# EAGLE board decrementeur3b_2layers (EAGLE 6.3)
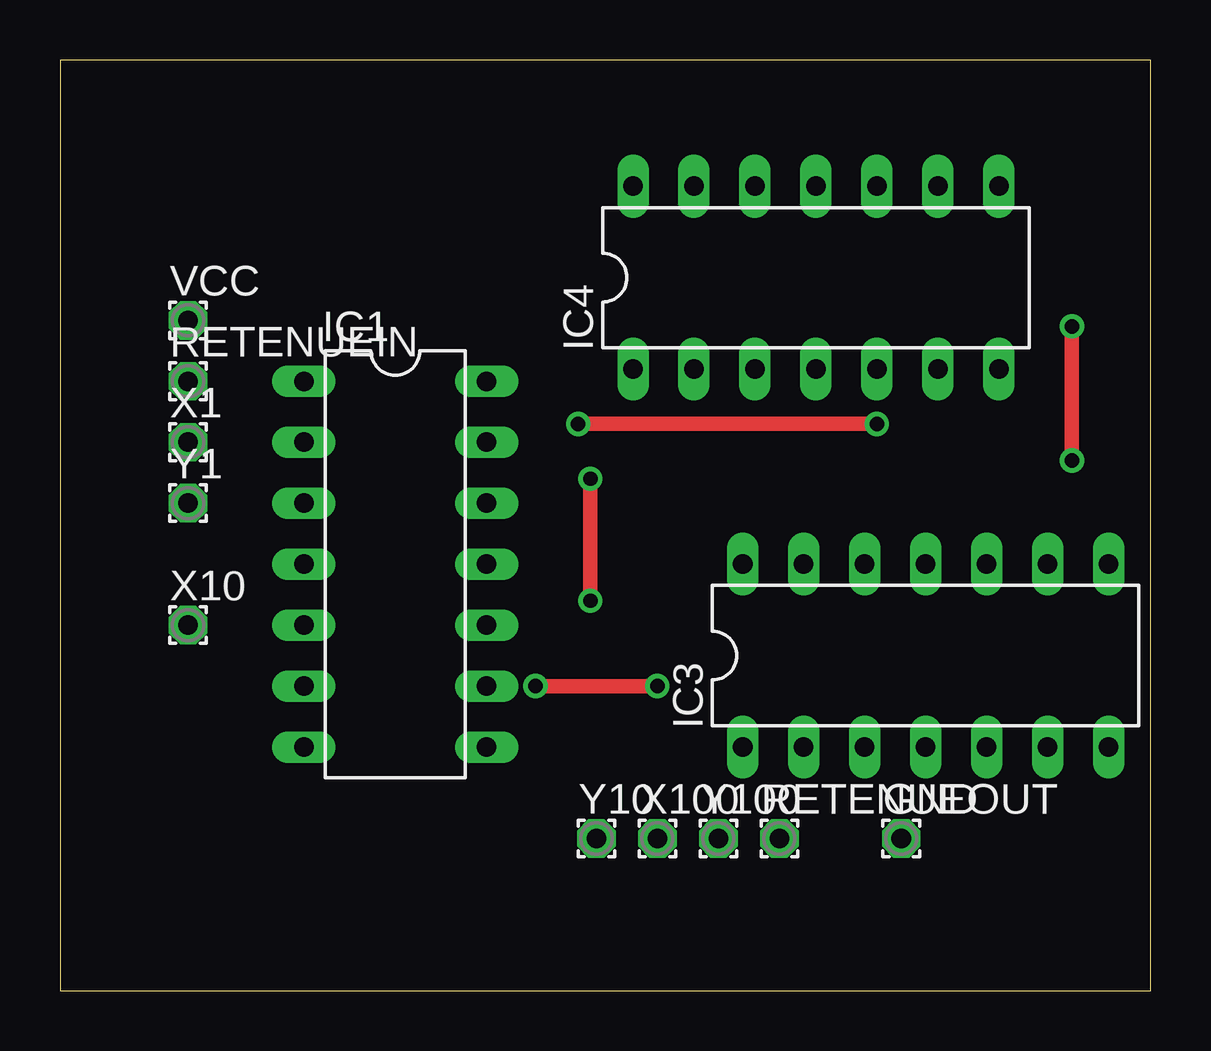
[diagram p0: board, top side]
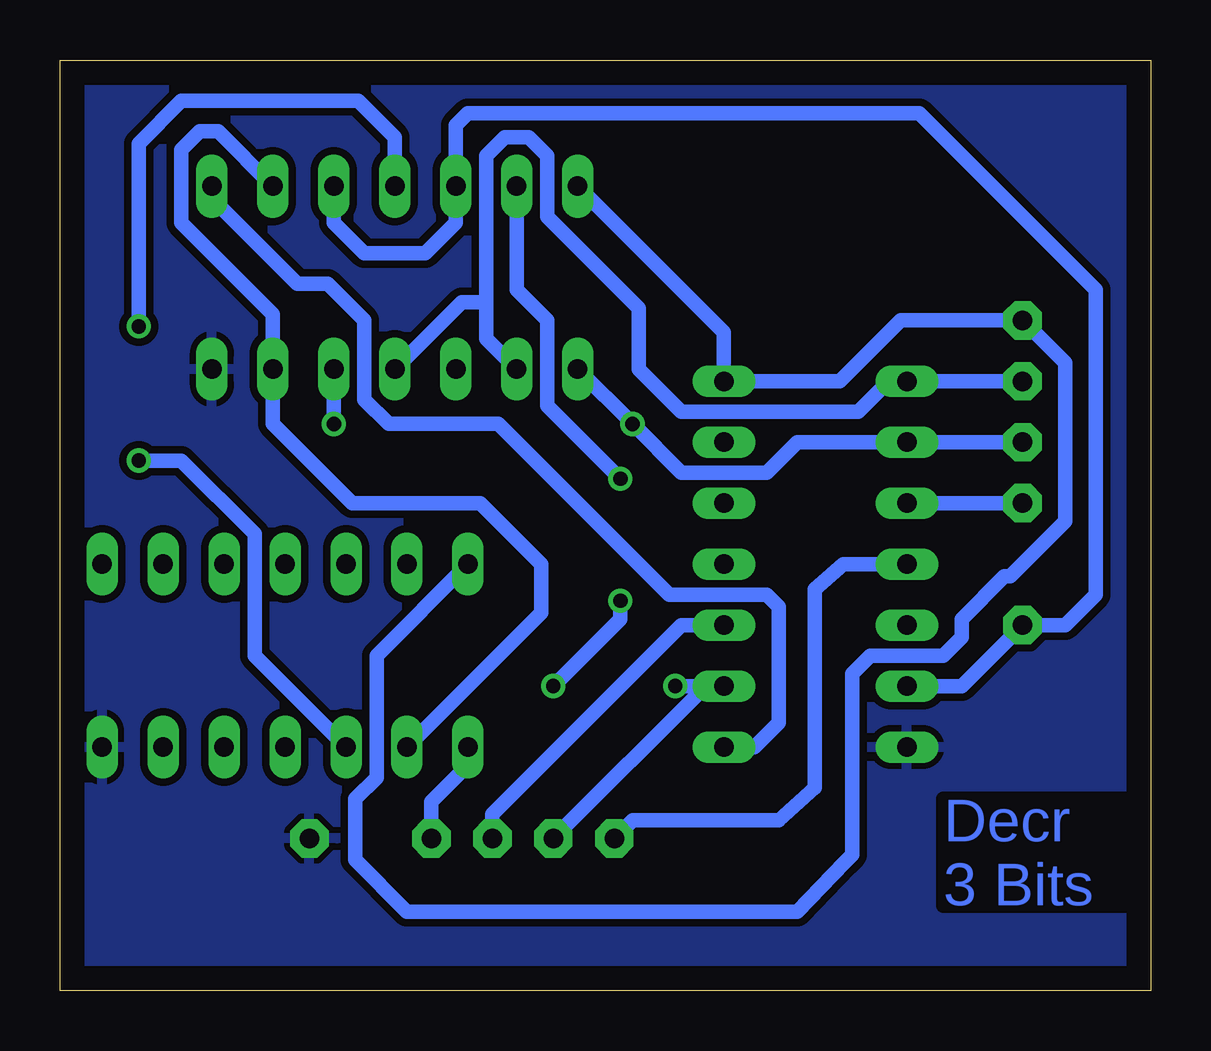
[diagram p1: board, bottom side, seen from below]

Size 45.45 x 38.79 mm. Coordinates in mm from the lower left corner, seen from the top.
Outline: 0,0 45.45,0 45.45,38.79 0,38.79 0,0
Copper layers (1*16): Top 0.035mm / dielectric 1.5mm / Bottom 0.035mm
Design rules "default *": minimum track width 10mil, minimum drill 20mil, track to track 12mil, track to pad 12mil, pad to pad 12mil, via to via 12mil, smd to smd 12mil, copper to edge 40mil, drill to drill 10mil, minimum pad ring 10mil, minimum via ring 8mil, stop-mask expansion 4mil, vias tented up to drill 0mil, thermal gap 10mil

## Footprints (pad centres in the part's own frame; a part is rotated, then mirrored left to right if it is on the bottom)
1,6/0,8 = drill 0.813 pad 1.6 octagon: 1 0,0
DIL14 = drill 0.813 long: 1 -7.62,-3.81; 2 -5.08,-3.81; 3 -2.54,-3.81; 4 0,-3.81; 5 2.54,-3.81; 6 5.08,-3.81; 7 7.62,-3.81; 8 7.62,3.81; 9 5.08,3.81; 10 2.54,3.81; 11 0,3.81; 12 -2.54,3.81; 13 -5.08,3.81; 14 -7.62,3.81

## Placement (x,y rotation side)
GND  WIREPAD1,6/0,8  [1,6/0,8]  35.05,6.35 0 top
IC1  74HC266N  [DIL14]  13.97,17.78 270 top
IC3  74AC02N  [DIL14]  36.07,13.97 0 top
IC4  74AC32N  [DIL14]  31.5,29.72 0 top
RETENUEIN  WIREPAD1,6/0,8  [1,6/0,8]  5.33,25.4 0 top
RETENUEOUT  WIREPAD1,6/0,8  [1,6/0,8]  29.97,6.35 0 top
VCC  WIREPAD1,6/0,8  [1,6/0,8]  5.33,27.94 0 top
X1  WIREPAD1,6/0,8  [1,6/0,8]  5.33,22.86 0 top
X10  WIREPAD1,6/0,8  [1,6/0,8]  5.33,15.24 0 top
X100  WIREPAD1,6/0,8  [1,6/0,8]  24.89,6.35 0 top
Y1  WIREPAD1,6/0,8  [1,6/0,8]  5.33,20.32 0 top
Y10  WIREPAD1,6/0,8  [1,6/0,8]  22.35,6.35 0 top
Y100  WIREPAD1,6/0,8  [1,6/0,8]  27.43,6.35 0 top

## Library data of the parts
GND RETENUEIN RETENUEOUT VCC X1 X10 X100 Y1 Y10 Y100 = wirepad
IC1 IC3 IC4 = 74xx-eu

## Nets
GND: GND.1 IC1.7 IC3.7 IC4.7
N$1: IC1.2 IC4.1 IC4.5 X1.1
N$2: IC1.1 IC4.2 IC4.4 RETENUEIN.1
N$3: IC1.3 Y1.1
N$4: IC3.2 IC4.6 IC4.9
N$5: IC1.8 IC4.8
N$6: IC1.9 IC4.13 X100.1
N$7: IC1.6 IC4.10 IC4.12 X10.1
N$8: IC1.5
N$9: IC1.10 Y100.1
N$10: IC1.4 Y10.1
N$11: IC3.3 IC4.11
N$12: IC3.1 RETENUEOUT.1
VCC: IC1.14 IC3.14 IC4.14 VCC.1

## Tracks (layer width: path | path; a pad name or v marks a point on that pad's centre or on a via)
GND
  pour Bottom: -1.52,39.62 46.74,39.37 46.74,-1.02 -1.52,-0.76
N$1  (via drill 0.6)
  Top 0.61: v21.59,23.62 v34.04,23.62
  Bottom 0.61: X1.1 IC1.2 14.73,22.86 16,21.59 19.56,21.59 v21.59,23.62 IC4.1 | v34.04,23.62 IC4.5
N$2
  Bottom 0.61: RETENUEIN.1 IC1.1 10.92,25.4 12.19,24.13 19.56,24.13 21.34,25.91 21.34,28.45 25.15,32.26 25.15,34.8 25.91,35.56 26.92,35.56 27.69,34.8 27.69,28.7 | IC4.2 27.69,27.18 27.69,28.7 | 27.69,28.7 28.7,28.7 IC4.4
N$3
  Bottom 0.61: IC1.3 Y1.1
N$4
  Bottom 0.61: IC4.9 38.86,35.81 39.62,35.81 40.39,35.05 40.39,32 36.58,28.19 IC4.6 36.58,23.62 33.27,20.32 27.94,20.32 25.4,17.78 25.4,15.75 IC3.2
N$5
  Bottom 0.61: IC4.8 39.12,33.02 35.56,29.46 34.29,29.46 32.77,27.94 32.77,24.64 31.75,23.62 27.18,23.62 20.07,16.51 16,16.51 15.49,16 15.49,11.18 16.51,10.16 IC1.8
N$6  (via drill 0.6)
  Top 0.61: v22.1,21.34 v22.1,16.26 | v24.89,12.7 v19.81,12.7
  Bottom 0.61: IC4.13 26.42,29.21 25.15,27.94 25.15,24.38 v22.1,21.34 | IC1.9 18.29,12.7 18.54,12.7 | 18.54,12.7 X100.1 | v22.1,16.26 22.1,15.49 v24.89,12.7 | v19.81,12.7 18.54,12.7
N$7
  Bottom 0.61: IC4.10 34.04,32 32.77,30.73 30.23,30.73 28.96,32 IC4.12 28.96,34.29 28.96,34.8 28.96,36.07 28.45,36.58 9.65,36.58 2.29,29.21 2.29,16.51 3.56,15.24 X10.1 7.87,12.7 IC1.6
N$9
  Bottom 0.61: IC1.10 19.56,15.24 27.43,7.37 Y100.1
N$10
  Bottom 0.61: IC1.4 12.8,17.78 13.99,16.74 13.99,8.46 15.49,7.11 21.59,7.11 Y10.1
N$11  (via drill 0.6)
  Top 0.61: v42.16,27.69 v42.16,22.1
  Bottom 0.61: IC4.11 31.5,35.56 33.02,37.08 40.39,37.08 42.16,35.31 v42.16,27.69 | v42.16,22.1 40.39,22.1 37.34,19.05 37.34,13.97 IC3.3
N$12
  Bottom 0.61: IC3.1 28.45,9.4 29.97,7.87 RETENUEOUT.1
VCC
  Bottom 0.61: IC4.14 17.78,27.43 IC1.14 12.95,25.4 10.41,27.94 VCC.1 3.56,26.16 3.56,19.56 5.84,17.27 6.1,17.27 7.87,15.49 7.87,14.73 8.64,13.97 11.68,13.97 12.45,13.21 12.45,5.66 12.74,5.37 14.73,3.3 30.99,3.3 33.15,5.46 33.15,8 32.26,8.89 32.26,13.97 IC3.14

## Text on the board
Bottom: Decr / 3 Bits